# EAGLE board FM-Radio-Simple-Receiver-BB (EAGLE 7.2.0)
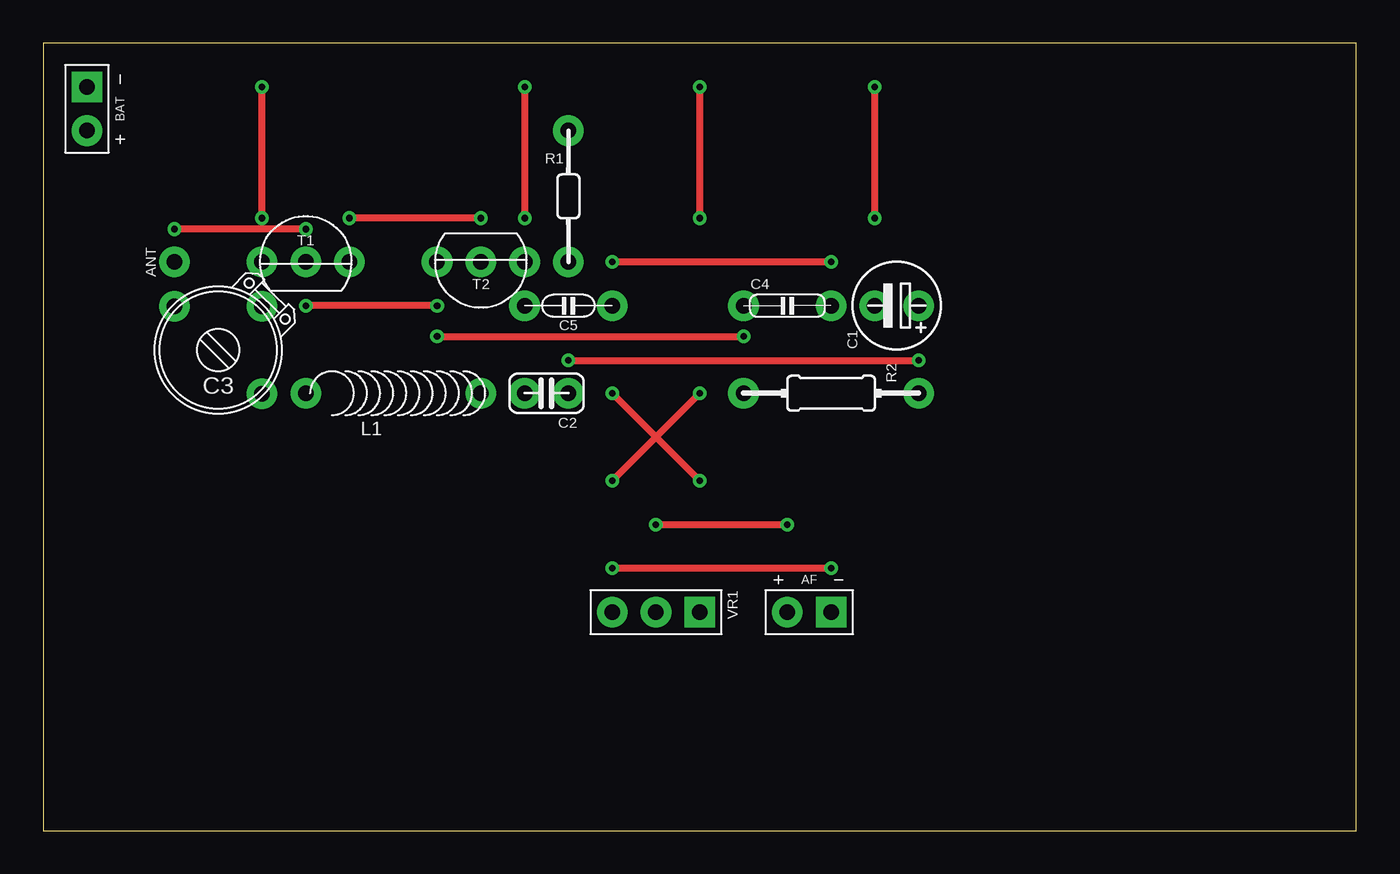
[diagram p0: board, top side]
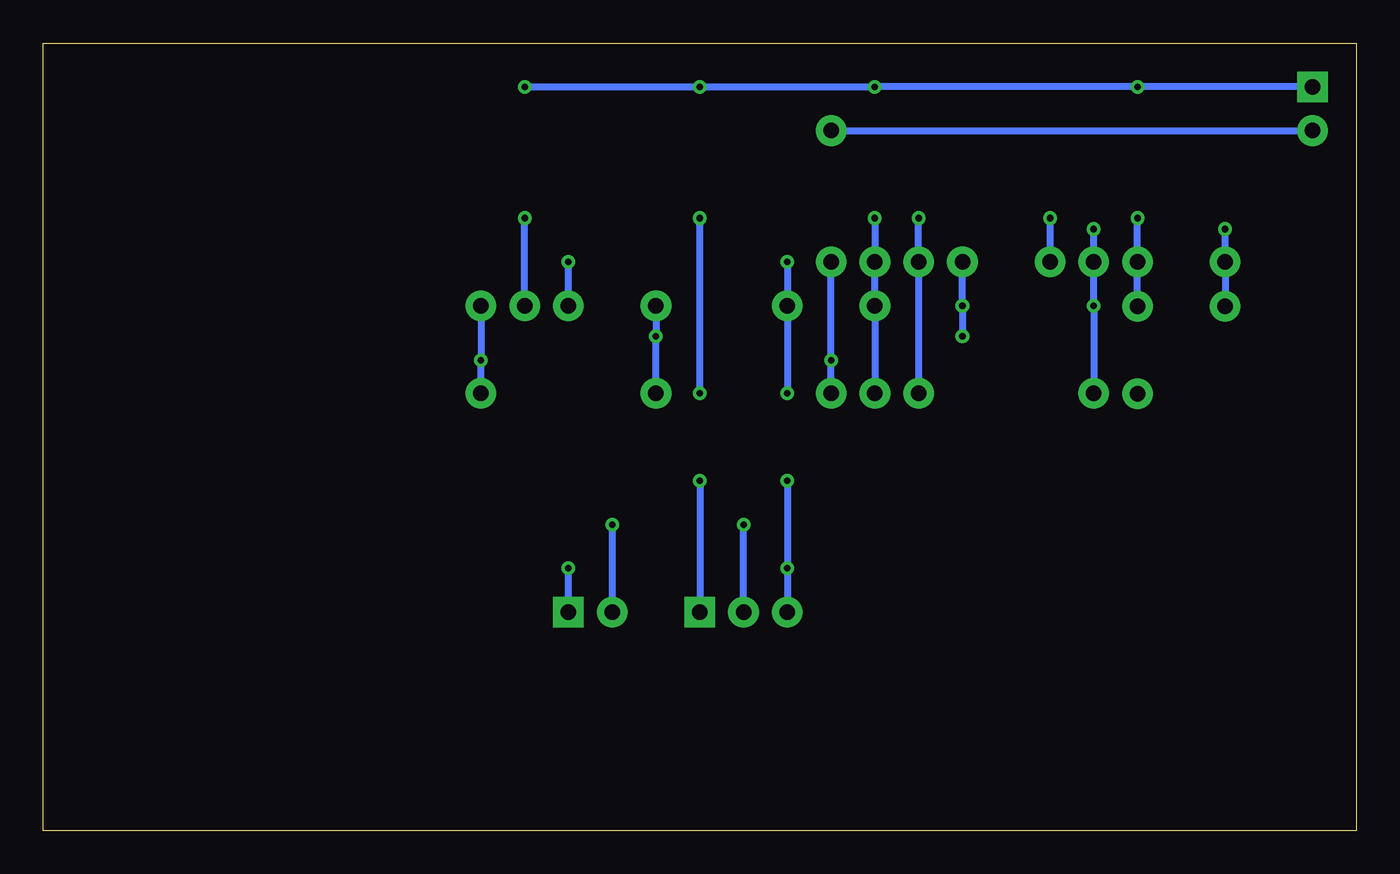
[diagram p1: board, bottom side, seen from below]

Size 76.2 x 45.72 mm. Coordinates in mm from the lower left corner, seen from the top.
Outline: 0,0 76.2,0 76.2,45.72 0,45.72 0,0
Copper layers (1*16): Top 0.035mm / dielectric 1.5mm / Bottom 0.035mm
Design rules "default": minimum track width 10mil, minimum drill 24mil, track to track 8mil, track to pad 8mil, pad to pad 8mil, via to via 8mil, smd to smd 8mil, copper to edge 40mil, drill to drill 8mil, minimum pad ring 10mil, minimum via ring 8mil, stop-mask expansion 4mil, vias tented up to drill 0mil, thermal gap 10mil
tKeepout: area 0,36.8 to 76.2,39.4; area 0,6.3 to 76.2,8.9; area 0,21.6 to 76.2,24.1

## Footprints (pad centres in the part's own frame; a part is rotated, then mirrored left to right if it is on the bottom)
SPAD+- = drill 0.9 pad 1.778 square: 1 0,-1.27 | drill 0.9 pad 1.778: 2 0,1.27
SPAD = drill 0.9 pad 1.778: 1 0,0
SPAD-+ = drill 0.9 pad 1.778 square: 1 0,-1.27 | drill 0.9 pad 1.778: 2 0,1.27
E2,5-5/V = drill 0.9 pad 1.778: + 0,-1.27; - 0,1.27
C025-024X044 = drill 0.9 pad 1.778: 1 -1.27,0; 2 1.27,0
TRIM-2222-808 = drill 0.9 pad 1.778: 1 -2.54,2.54; 2 -2.54,-2.54; 3 2.54,-2.54
C050-020X044 = drill 0.9 pad 1.778: 1 -2.54,0; 2 2.54,0
C050-020X036/V = drill 0.9 pad 1.778: 1 0,-2.54; 2 0,2.54
L-04/8 = drill 0.9 pad 1.778: 1 5.08,0; 2 -5.08,0
0202/7-V = drill 0.9 pad 1.778: 1 0,3.81; 2 0,-3.81
0204/10-V = drill 0.9 pad 1.778: 1 0,5.08; 2 0,-5.08
TO92-EBC = drill 0.9 pad 1.778: B 0,0; C 0,2.54; E 0,-2.54
CONN-3P = drill 0.9 pad 1.778 square: 1 0,2.54 | drill 0.9 pad 1.778: 2 0,0; 3 0,-2.54

## Placement (x,y rotation side)
AF  SPAD+-+-  [SPAD+-]  44.45,12.7 90 top
ANT  ANT  [SPAD]  7.62,33.02 0 top
BAT  VCC_GNDL  [SPAD-+]  2.54,41.91 180 top
C1  100µF  [E2,5-5/V]  49.53,30.48 90 top
C2  100nF  [C025-024X044]  29.21,25.4 180 top
C3  2 - 20pF  [TRIM-2222-808]  10.16,27.9 180 top
C4  220nF  [C050-020X044]  43.18,30.48 0 top
C5  2.2nF  [C050-020X036/V]  30.48,30.48 90 top
L1  200nH  [L-04/8]  20.32,25.4 180 top
R1  1kΩ  [0202/7-V]  30.48,36.83 0 top
R2  10kΩ  [0204/10-V]  45.72,25.4 270 top
T1  2N2222-EBC  [TO92-EBC]  15.24,33.02 270 top
T2  2N2222-EBC  [TO92-EBC]  25.4,33.02 90 top
VR1  10kΩ  [CONN-3P]  35.56,12.7 270 top

## Library data of the parts
AF ANT BAT = pad
C1 C2 C4 C5 = c
C3 = cap-trim
L1 = l
R1 R2 VR1 = r
T1 T2 = t

## Nets
AF: C4.2 C5.1 VR1.1
ANT: ANT.1 C3.3 C4.1 L1.1 R2.2 T1.B T2.C
GND: AF.1 BAT.1 C1.- C2.2 C3.2 C5.2 T1.E T2.E VR1.3
HOT: L1.2 T1.C T2.B
OUT: AF.2 VR1.2
SUP: C1.+ C2.1 R1.2 R2.1
VCC: BAT.2 R1.1

## Tracks (layer width: path | path; a pad name or v marks a point on that pad's centre or on a via)
AF  (via drill 0.38)
  Top 0.406: v45.72,33.02 v33.02,33.02 | v33.02,25.4 v38.1,20.32
  Bottom 0.406: C4.2 v45.72,33.02 | v33.02,33.02 C5.1 v33.02,25.4 | v38.1,20.32 VR1.1
ANT  (via drill 0.38)
  Top 0.406: v22.86,30.48 v15.24,30.48 | v15.24,34.92 v7.62,34.92 | v22.86,28.7 v40.64,28.7
  Bottom 0.406: T2.C v22.86,30.48 v22.86,28.7 | v15.24,30.48 T1.B | v15.24,30.48 L1.1 | v15.24,30.48 v15.24,34.92 | C4.1 v40.64,28.7 R2.2 | v7.62,34.92 ANT.1 C3.3
GND  (via drill 0.38)
  Top 0.406: v12.7,35.56 v12.7,43.18 | v27.94,43.18 v27.94,35.56 | v38.1,25.4 v33.02,20.32 | v38.1,35.56 v38.1,43.18 | v48.26,35.56 v48.26,43.18 | v45.72,15.24 v33.02,15.24
  Bottom 0.406: BAT.1 v12.7,43.18 v27.94,43.18 v38.1,43.18 v48.26,43.18 | v12.7,35.56 T1.E C3.2 | v27.94,35.56 T2.E C5.2 C2.2 | v33.02,20.32 VR1.3 v33.02,15.24 | C1.- v48.26,35.56 | v38.1,25.4 v38.1,35.56 | AF.1 v45.72,15.24
HOT  (via drill 0.38)
  Top 0.406: v25.4,35.56 v17.78,35.56
  Bottom 0.406: v25.4,35.56 T2.B L1.2 | v17.78,35.56 T1.C
OUT  (via drill 0.38)
  Top 0.406: v35.56,17.78 v43.18,17.78
  Bottom 0.406: VR1.2 v35.56,17.78 | v43.18,17.78 AF.2
SUP  (via drill 0.38)
  Top 0.406: v30.48,27.3 v50.8,27.3
  Bottom 0.406: R1.2 v30.48,27.3 C2.1 | R2.1 v50.8,27.3 C1.+
VCC
  Bottom 0.406: R1.1 BAT.2